# EAGLE board Front_left_lamp_v4 (EAGLE 7.3.0)
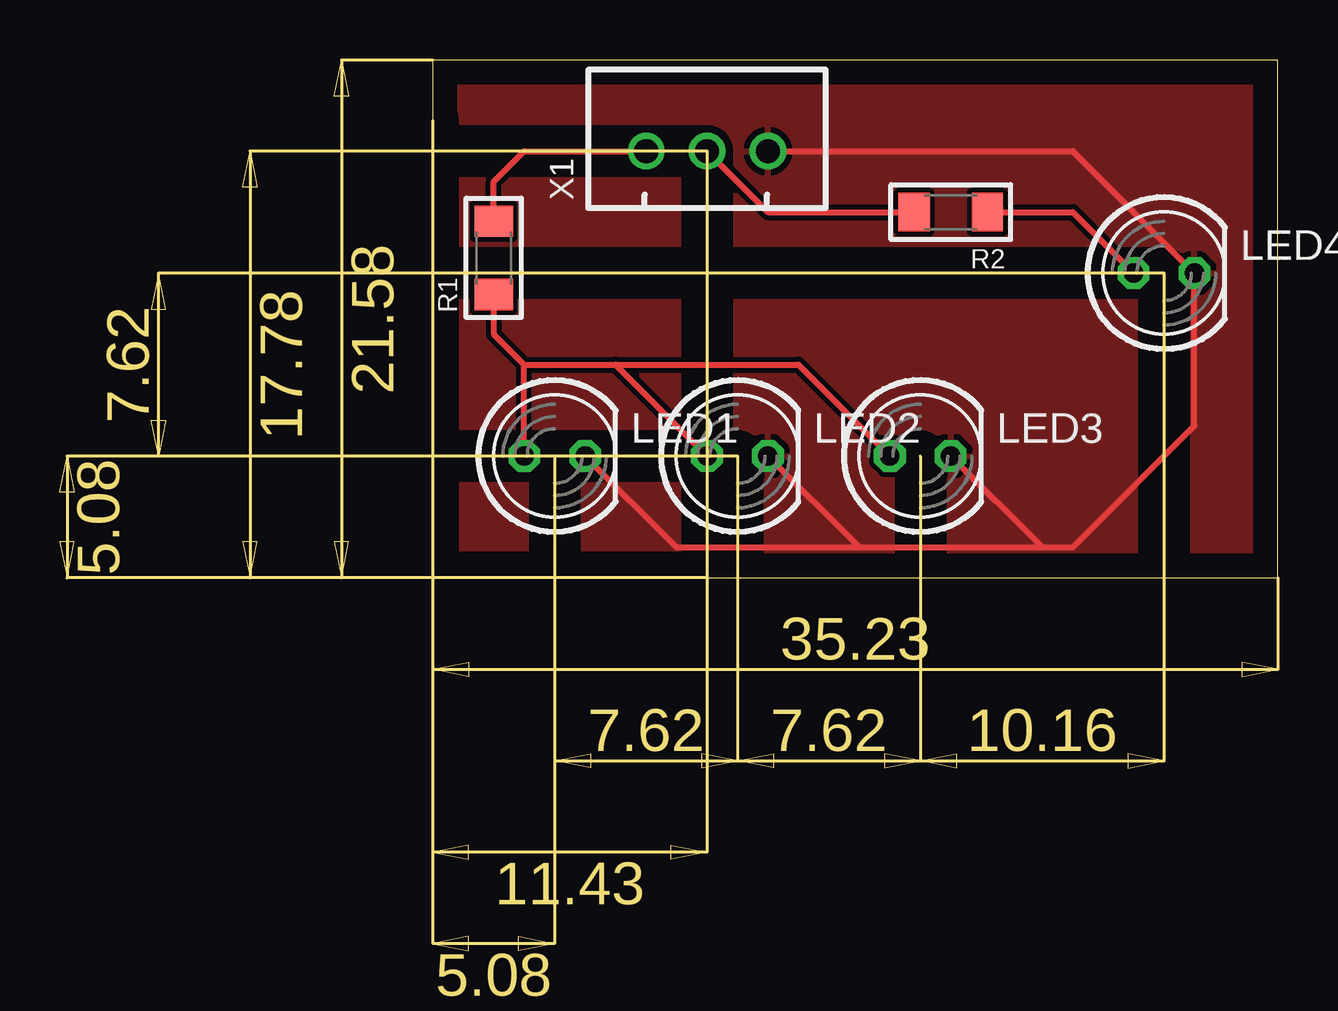
[diagram p0: board, top side]

Size 35.23 x 21.58 mm. Coordinates in mm from the lower left corner, seen from the top.
Outline: 0,0 35.23,0 35.23,21.58 0,21.58 0,0
Copper layers (1*16): Top 0.035mm / dielectric 1.5mm / Bottom 0.035mm
Design rules "default": minimum track width 10mil, minimum drill 24mil, track to track 8mil, track to pad 8mil, pad to pad 8mil, via to via 8mil, smd to smd 8mil, copper to edge 40mil, drill to drill 8mil, minimum pad ring 10mil, minimum via ring 8mil, stop-mask expansion 4mil, vias tented up to drill 0mil, thermal gap 10mil

## Footprints (pad centres in the part's own frame; a part is rotated, then mirrored left to right if it is on the bottom)
LED5MM = drill 0.813 octagon: A -1.27,0; K 1.27,0
R1206 = smd 1.3 x 1.6: 1 -1.524,0; 2 1.524,0
JST-XH-03-PACKAGE-ROUND-PAD = drill 1.016: 1 -2.54,0; 2 0,0; 3 2.54,0

## Placement (x,y rotation side)
LED1  2.58 V  [LED5MM]  5.08,5.08 0 top
LED2  2.58 V  [LED5MM]  12.7,5.08 0 top
LED3  2.58 V  [LED5MM]  20.32,5.08 0 top
LED4  1.88 V  [LED5MM]  30.48,12.7 0 top
R1  1K5  [R1206]  2.54,13.34 90 top
R2  680  [R1206]  21.59,15.24 180 top
X1  JST-XH-03-PIN-ROUND-PAD  [JST-XH-03-PACKAGE-ROUND-PAD]  11.43,17.78 0 top

## Library data of the parts
LED1-LED3 = led; COLOR: White; CURRENT: 0.14 mA
LED4 = led; COLOR: Yellow; CURRENT: 1.42 mA
R1 R2 = rc-master-smd
X1 = Rembrandt Electronics - JST XH Connectors v1-0

## Nets
API_START_ENGINE: LED1.A LED2.A LED3.A R1.1
API_TURN_LEFT: R2.2 X1.2
GND: LED1.K LED2.K LED3.K LED4.K X1.3
N$1: R1.2 X1.1
N$2: LED4.A R2.1

## Tracks (layer width: path | path; a pad name or v marks a point on that pad's centre or on a via)
API_START_ENGINE
  Top 0.254: 3.81,8.89 2.54,10.16 R1.1 | 3.81,8.89 7.62,8.89 | 7.62,8.89 15.24,8.89 LED3.A | LED2.A 7.62,8.89 | LED1.A 3.81,8.89
API_TURN_LEFT
  Top 0.254: X1.2 13.97,15.24 R2.2
GND
  Top 0.254: X1.3 26.67,17.78 LED4.K 31.75,6.35 26.67,1.27 25.4,1.27 | LED1.K 10.16,1.27 17.78,1.27 | 17.78,1.27 25.4,1.27 | LED3.K 25.4,1.27 | LED2.K 17.78,1.27
  pour Top: 0,21.59 35.56,21.59 35.56,0 0,0
N$1
  Top 0.254: R1.2 2.54,16.51 3.81,17.78 X1.1
N$2
  Top 0.254: LED4.A 26.67,15.24 R2.1